# Altium PCB RFIDv2.PcbDoc
Units mil, origin at the board's own origin, x right, y up, seen from the top; angles counter-clockwise.
Board outline 4822.83 x 2165.35 mil, 3 copper layers (Top Layer, Mid-Layer 16, Bottom Layer); 42 components, 21 nets, 156 pads, 26 vias.
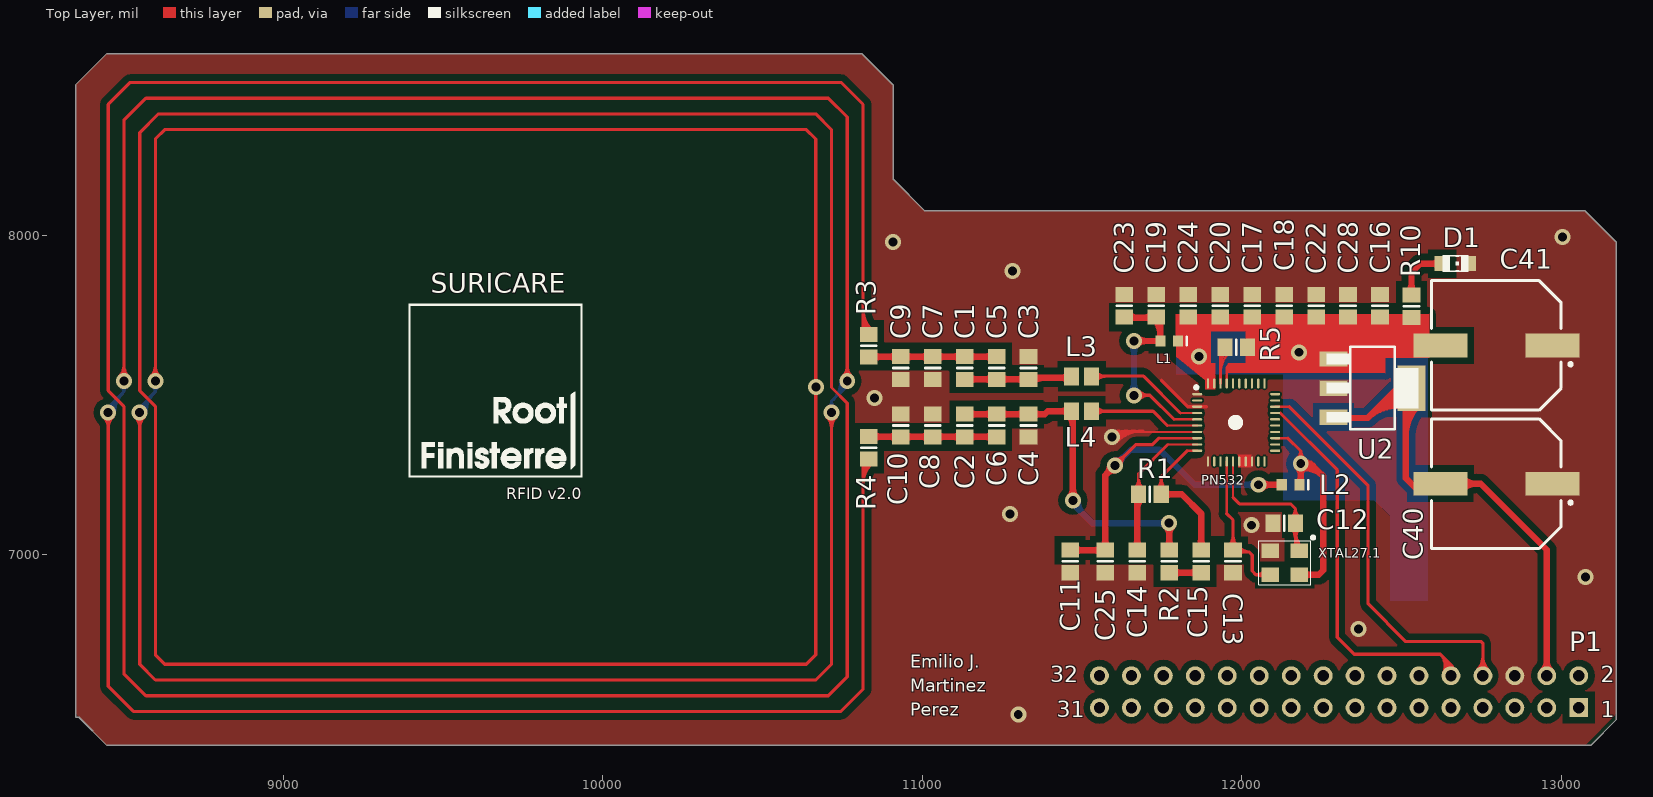
[diagram p0: Top Layer view]
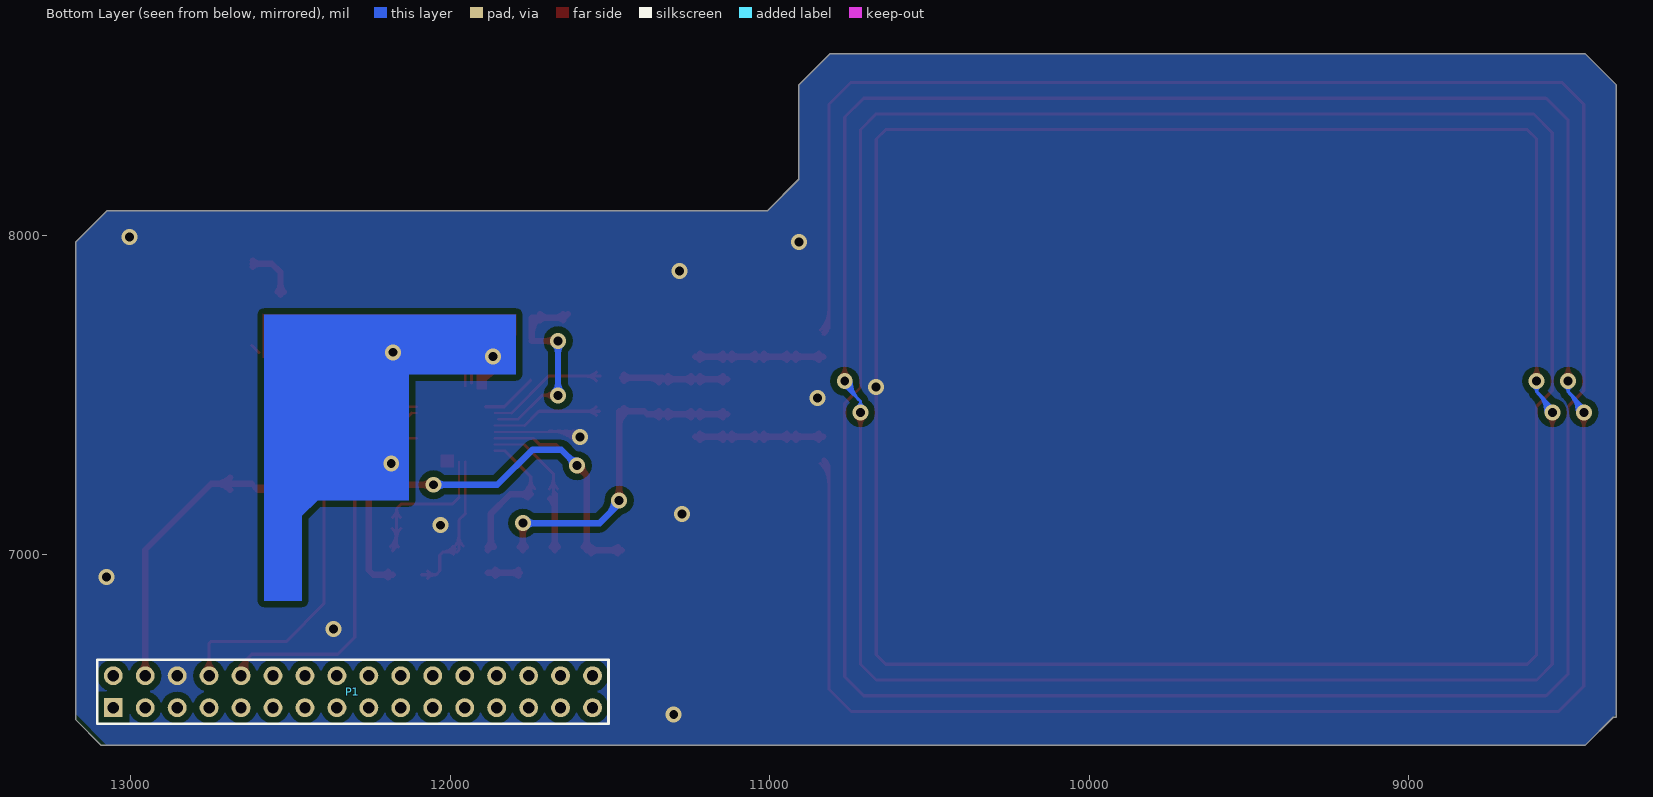
[diagram p1: Bottom Layer view, seen from below]
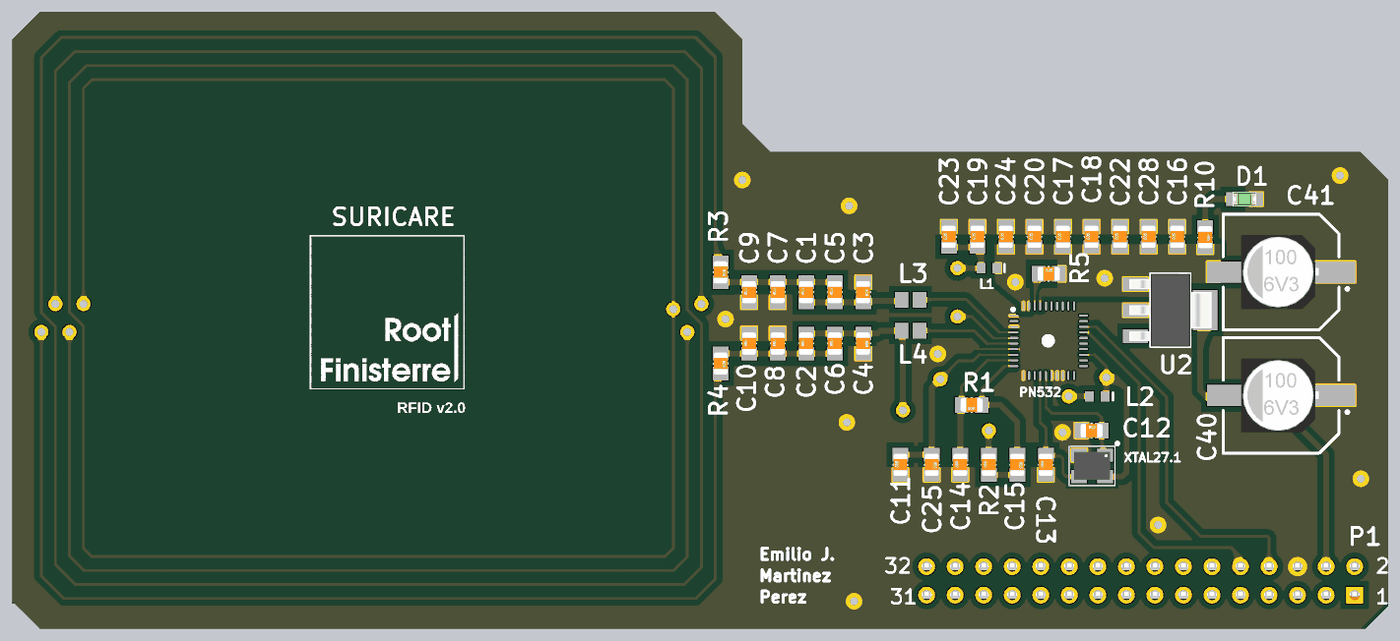
[diagram p2: 3D render of the assembled board from above, using the file's embedded part models]

## Layer stack, top to bottom
Top Layer: signal copper 1.4
Dielectric: dielectric 12.6, FR-4, Dk 4.8
Mid-Layer 16: signal copper 1.4
Dielectric: dielectric 12.6, FR-4, Dk 4.8
Bottom Layer: signal copper 1.4

## Board outline
8349.41,8470.47 8447.83,8568.9 10810.04,8568.9 10908.46,8470.47 10908.46,8175.2 11006.89,8076.77 13073.82,8076.77 13172.24,7978.35 13172.24,6484.35 13091.43,6403.54 13073.82,6403.54 8447.83,6403.54 8359.56,6491.82 8349.41,6491.82

## Design rules (kind name [scope] priority, off if disabled: settings)
Clearance Clearance_PN532 [InComponent('PN532')] p1: gap=5
Clearance "Clearance global" [All] p2: gap=20
PlaneClearance PlaneClearance_PN532 [InComponent('PN532')] p1: clearance=20
PlaneClearance [All] p2: clearance=15
PlaneConnect [All] p1: planeconnectstyle=Direct reliefexpansion=40 reliefentries=4 reliefconductorwidth=40 reliefairgap=0
PolygonConnect [All] p1: connectstyle=Direct reliefconductorwidth=30 reliefentries=4 polygonreliefangle="90 Angle" airgapwidth=0
RoutingVias [All] p1: holewidth=28 width=50 viastyle="Through Hole" minholewidth=28 minwidth=50 maxholewidth=28 maxwidth=50
SolderMaskExpansion [All] p1: expansion=4
Width [All] p1: maxlimit=20 minlimit=5 preferedwidth=20 midlayer16_minwidth=10 midlayer16_maxwidth=10 midlayer16_prefwidth=10 minimp=50.000000 maximp=50.000000 favimp=50.000000
26 further rules are at their usual default settings.

## Components (designator, comment, footprint, x,y, rotation, side; value= is the part's Value field where it differs from the comment)
C1 "22p" 0805 11132.09,7584.65 r90 top
C2 "22p" 0805 11132.09,7404.65 r90 top
C3 "220p" 0805 11332.09,7584.65 r270 top
C4 "NC" 0805 11332.09,7404.65 r270 top
C5 "NC" 0805 11232.09,7584.65 r90 top
C6 "NC" 0805 11232.09,7404.65 r90 top
C7 "220p" 0805 11032.09,7584.65 r90 top
C8 "220p" 0805 11032.09,7404.65 r90 top
C9 "NC" 0805 10932.09,7584.65 r90 top
C10 "NC" 0805 10932.09,7404.65 r90 top
C11 "10u" 0805 11462.09,6979.21 r90 top
C12 "12p" 0805 12132.09,7099.21 r0 top
C13 "12p" 0805 11972.09,6979.21 r90 top
C14 "0.1u" 0805 11672.09,6979.21 r90 top
C15 "1000p" 0805 11872.09,6979.21 r270 top
C16 "0.1u" 0805 12432.09,7779.21 r90 top
C17 "0.1u" 0805 12032.09,7779.21 r90 top
C18 "10u" 0805 12132.09,7779.21 r90 top
C19 "10u" 0805 11732.09,7779.21 r90 top
C20 "CAP" 0805 11932.09,7779.21 r90 top
C22 "0.1u" 0805 12232.09,7779.21 r90 top
C23 "0.1u" 0805 11632.09,7779.21 r90 top
C24 "0.1u" 0805 11832.09,7779.21 r90 top
C25 "0.1u" 0805 11572.09,6979.21 r270 top
C28 "CAP" 0805 12332.09,7779.21 r90 top
C40 "Comment" CAPAE-G 12971.46,7222.44 r180 top
C41 "Comment" CAPAE-G 12971.46,7655.51 r180 top
D1 "LED_SMD" LED0805_GREEN 12668.31,7911.42 r270 top
L1 "Inductor" INDC1608L 11772.09,7669.21 r180 top
L2 "Inductor" INDC1608L 12152.09,7219.21 r180 top
L3 "Comment" 2029 11498.03,7558.07 r0 top
L4 "Comment" 2029 11498.03,7449.8 r0 top
P1 "Header 16X2" HDR2X16 13054.13,6521.65 r180 bottom
PN532 "PN532" PN532 11982.09,7414.21 r0 top
R1 "1k" 0805 11712.09,7189.21 r180 top
R2 "1.69k" 0805 11772.09,6979.21 r90 top
R3 "3.3" 0805 10832.09,7654.65 r270 top
R4 "3.3" 0805 10832.09,7334.65 r270 top
R5 "10k" 0805 11982.09,7649.21 r0 top
R10 "2k" 0805 12530.51,7777.56 r270 top
U2 "CX1117" SOT223 12408.46,7521.65 r270 top
XTAL27.1 "XTAL" "Crystal SMD" 12132.09,6969.21 r180 top (schematic designator 27.12MHz)

## Footprints (in the part's own frame and the unit in brackets; to place one, negate y for a bottom-side part, rotate by r counter-clockwise, add the part's x,y. Pads: shape width x height; smd on the part's side, far side on the other; paste and mask are expansions set on the pad)
0805 [mm]
  rect 1.2x1.4 smd: 1(-0.9,0) 2(0.9,0)
  silkscreen extent 0,-0.6 0,0.6, body extent -1,-0.62 1,0.63, height 0.78
2029 [mm] "Chip Inductor, Body 2.0x1.2mm, IPC High Density"
  rect 1.2x1.4 smd: 1(-0.8,0)
  rect 1.2x1.4 smd paste+0: 2(0.8,0)
  body extent -1.1,-0.7 1.1,0.7, height 0.55
CAPAE-G [mm]
  rect 4.3x1.9 smd: 1(0,0) 2(8.9,0)
  silkscreen extent -1.58,-5.15 9.6,5.15, body extent 1.1,-3.3 8.3,3.3, height 5.5
"Crystal SMD" [mm] "Quartz Crystal, SM; Body 3.2 x 2.5 mm (LxW max)"
  rect 1.4x1.15 smd: 1(-1.2,-1.1) 2(1.1,-1.1) 3(1.1,0.8) 4(-1.2,0.8)
  silkscreen extent -2.43,-2.27 2,1.6, body extent -1.65,-1.4 1.55,1.1, height 0.91
HDR2X16 [mm] "Connector; Header; 16x2 Position"
  rect 1.5x1.5 hole 0.9: 1(0,0)
  round 1.5 hole 0.9: 2(0,2.54) 3(2.54,0) 4(2.54,2.54) 5(5.08,0) 6(5.08,2.54) 7(7.62,0) 8(7.62,2.54) 9(10.16,0) 10(10.16,2.54) 11(12.7,0) 12(12.7,2.54) 13(15.24,0) 14(15.24,2.54) 15(17.78,0) 16(17.78,2.54) 17(20.32,0) 18(20.32,2.54) 19(22.86,0) 20(22.86,2.54) 21(25.4,0) 22(25.4,2.54) 23(27.94,0) 24(27.94,2.54) 25(30.48,0) 26(30.48,2.54) 27(33.02,0) 28(33.02,2.54) 29(35.56,0) 30(35.56,2.54) 31(38.1,0) 32(38.1,2.54)
  silkscreen extent -1.27,-1.27 39.37,3.81, body extent -1.39,-1.1 39.5,3.9, height 8.5
INDC1608L [mm] "Chip Inductor, Body 1.6x0.8mm, IPC High Density"
  rect 0.8x0.9 smd: 1(-0.7,0) 2(0.7,0)
  silkscreen extent -1.4,-0.35 -1.4,0.35, body extent -0.87,-0.48 0.87,0.48, height 0.55
LED0805_GREEN [mm]
  rect 1.2x1.2 smd: A(0,-1.05) C(0,1.05)
  silkscreen extent -0.68,-1.05 0.68,1.05, body extent -0.62,-1.01 0.62,1.01, height 1.1
PN532 [mm] "40-Pin Leaded Chip Carrier 0.5 mm Pitch, IPC High Density"
  oval 0.8x0.18 smd: 1(-3.1,2.25) 2(-3.1,1.75) 3(-3.1,1.25) 4(-3.1,0.75) 5(-3.1,0.25) 6(-3.1,-0.25) 7(-3.1,-0.75) 8(-3.1,-1.25) 9(-3.1,-1.75) 10(-3.1,-2.25) 21(3.1,-2.25) 22(3.1,-1.75) 23(3.1,-1.25) 24(3.1,-0.75) 25(3.1,-0.25) 26(3.1,0.25) 27(3.1,0.75) 28(3.1,1.25) 29(3.1,1.75) 30(3.1,2.25)
  oval 0.18x0.8 smd: 11(-2.25,-3.1) 12(-1.75,-3.1) 13(-1.25,-3.1) 14(-0.75,-3.1) 15(-0.25,-3.1) 16(0.25,-3.1) 17(0.75,-3.1) 18(1.25,-3.1) 19(1.75,-3.1) 20(2.25,-3.1) 31(2.25,3.1) 32(1.75,3.1) 33(1.25,3.1) 34(0.75,3.1) 35(0.25,3.1) 36(-0.25,3.1) 37(-0.75,3.1) 38(-1.25,3.1) 39(-1.75,3.1) 40(-2.25,3.1)
  silkscreen extent -3.3,-0.3 0.25,2.92, body extent -3,-3 3,3, height 1
SOT223 [mil]
  rect 48x88 smd: 1(-91,-122) 2(0,-122) 3(91,-122)
  rect 141.73x86.61 smd: 4(0,122.01)
  silkscreen extent -129,-144 129,144, body extent -128,-138 128,138, height 65

## Part data
C1 C2 C3 C4 C5 C6 C7 C8 C9 C10 C11 C12 C13 C14 C15 C16 C17 C18 C19 C20 C22 C23 C24 C25 C28: library part CAP_1, "Capacitor"
C40 C41: library part COND_ELEC_1
D1: "LED SMD"
P1: "Header, 16-Pin, Dual row"
R1 R2 R3 R4 R5 R10: library part RES_1, "Resistencia"
U2: "adjustable  and fixed voltage regulator"
XTAL27.1: "Crystal Oscillator"

## Via types
v1: diameter 50, hole 28, Top Layer to Bottom Layer, 26 vias

## Nets (pads, with @x,y where several pads share a name; then routed paths per layer and width w, separated by ;. In a path a pad name is that pad's centre, name@x,y a point inside that pad or via, vN(x,y) a via of type N, cw(c..) or ccw(c..) an arc to the next point about the centre after c; other vN are vias at no path point)
+V5: C40.2 P1.4 U2.3 U2.4 | length 2439.6
  Top Layer w20: U2.3@12298.28,7428.21 12393.76,7428.21 ; U2.3@12316.36,7420.75 cw(c12334.37,7402.75) 12334.37,7428.21 ; U2.3@12316.36,7440.55 ccw(c12346.16,7470.35) 12346.16,7428.21 ; 12418.06,7452.51 cw(c12497.2,7373.37) U2.4@12526.94,7481.27 ; 12442.36,7476.8 cw(c12507.7,7411.46) U2.4@12532.25,7500.55 ; 12466.65,7501.1 cw(c12518.19,7449.55) U2.4@12537.56,7519.83 ; U2.4@12490.94,7525.39 cw(c12528.69,7487.64) U2.4@12542.88,7539.11 ; U2.4@12498.15,7529.68 cw(c12484.77,7533) 12484.77,7519.21 ; U2.4@12499.58,7509.21 ccw(c12484.76,7503.25) 12484.76,7519.21 ; 12512.8,7371.01 cw(c12653.56,7371.01) U2.4@12554.02,7470.54 ; 12512.8,7419.29 cw(c12605.27,7419.29) U2.4@12539.88,7484.69 ; U2.4@12518.7,7519.21 12484.76,7519.21 ; U2.4@12521.62,7461.98 ccw(c12486.7,7335.29) 12393.77,7428.22 ; U2.4 12512.8,7503.98 12512.8,7240.16 12550.2,7202.76 C40.2@12601.38,7202.76 ; C40.2@12571.85,7210.63 C40.2@12609.25,7210.63 ; C40.2 12747.05,7222.44 12954.13,7015.35 P1.4 ; C40.2@12687.68,7203.07 cw(c12734.46,7156.29) 12734.46,7222.44 cw(c12734.46,7288.59) C40.2@12687.68,7241.82 ; P1.4@12940.33,6635.46 ccw(c12906.99,6668.8) 12954.13,6668.8 ccw(c13001.28,6668.8) P1.4@12967.94,6635.46 ; 12393.76,7428.21 12484.76,7519.21
GND: C3.1 C4.2 C7.1 C8.2 C9.1 C10.2 C11.1 C12.1 C13.1 C14.1 C16.2 C17.2 C18.2 C19.2 C20.2 C22.2 C23.2 C24.2 C25.2 C28.2 C40.1 C41.1 D1.C P1.6 PN532.1 PN532.3 PN532.7 PN532.11 PN532.16 PN532.17 PN532.18 U2.2 XTAL27.1.2 | length 720
  Top Layer w7: v1@11610.08,7384.69 PN532.7
  Top Layer w10: v1@11586.43,7375.18 cw(c11616.89,7344.73) 11616.89,7387.8 ; v1@11600.58,7361.04 cw(c11665.17,7296.44) 11665.17,7387.8 ; v1@11602.39,7386.03 ccw(c11606.56,7394.42) 11613.19,7387.79 ccw(c11619.82,7381.17) v1@11611.42,7377 ; v1@11607.65,7353.97 cw(c11689.31,7272.3) 11689.31,7387.8 ; v1@11610.08,7384.69 v1(11593.5,7368.11) cw(c11641.03,7320.59) 11641.03,7387.8 ; 11748,7546 11830.57,7463.43 11888,7463.43
  other v1: 11300,6500 12365.16,6767.72 13075.79,6930.12 12030.51,7092.52 11274.61,7127.95 10849.41,7490.16 10666.34,7525 11282.48,7887.8 10908.46,7978.35 13002.95,7994.09
Net27.12MHz_1: C13.2 PN532.14 XTAL27.1.3 | length 675.5
  Top Layer w7: 11952.56,7128.74 PN532.14
  Top Layer w10: 11952.56,7128.74 11972.09,7109.21 C13.2 11977.52,7009.21 12022.09,7009.21 ; C13.2@11958.92,7027.81 ccw(c11927.13,7059.6) 11972.09,7059.6 ccw(c12017.04,7059.6) C13.2@11985.25,7027.81 ; C13.2@11983.1,7019.57 ccw(c12002.94,7033.38) 12002.94,7009.21 ; C13.2@11989.19,7001.48 cw(c12007.86,6982.81) 12007.86,7009.21 ; C13.2@11991.31,7025.29 ccw(c12022.08,7046.72) 12022.08,7009.21 ; XTAL27.1.3@12070.9,6925.76 ccw(c12043.58,6900.56) 12043.58,6937.72 ; XTAL27.1.3@12070.9,6949.68 cw(c12043.58,6974.88) 12043.58,6937.72 ; XTAL27.1.3 12043.58,6937.72 ; 12022.09,7009.21 12032.09,6999.21 12032.09,6949.21 12043.58,6937.72
Net27.12MHz_2: C12.2 PN532.15 XTAL27.1.1 | length 689.8
  Top Layer w7: 11972.24,7179.06 PN532.15
  Top Layer w10: 11972.24,7179.06 11992.09,7159.21 12152.09,7159.21 12167.52,7143.78 ; C12.2@12154.35,7082.11 cw(c12122.56,7050.32) 12167.52,7050.32 cw(c12212.48,7050.32) C12.2@12180.69,7082.11 ; C12.2@12155.36,7117.26 ccw(c12132.51,7143.78) 12167.52,7143.78 ; XTAL27.1.1@12161.94,7024.99 ccw(c12148.46,7038.47) 12167.52,7038.47 ; 12167.52,7047.59 ccw(c12209.48,7047.59) XTAL27.1.1@12179.81,7017.92 ; C12.2@12167.52,7071.73 ccw(c12233.62,7071.73) XTAL27.1.1@12186.88,7024.99 ; XTAL27.1.1 12167.52,7024.33 C12.2 12167.52,7143.78 ; C12.2@12179.68,7117.26 cw(c12202.53,7143.78) 12167.52,7143.78
NetC1_1: C1.1 C3.2 C5.1 L3.1 | length 629.9
  Top Layer w20: C1.1 C5.1 C3.2 11337.52,7554.65 L3.1@11461.09,7554.65 ; C1.1@11145.66,7539.58 cw(c11168.91,7516.33) 11168.91,7549.21 cw(c11168.91,7582.1) C1.1@11145.66,7558.84 ; C5.1@11218.52,7539.58 ccw(c11195.26,7516.33) 11195.26,7549.21 ccw(c11195.26,7582.1) C5.1@11218.52,7558.84 ; C5.1@11245.66,7539.58 cw(c11268.91,7516.33) 11268.91,7549.21 cw(c11268.91,7582.1) C5.1@11245.66,7558.84 ; C3.2@11318.52,7539.58 ccw(c11295.26,7516.33) 11295.26,7549.21 ccw(c11295.26,7582.1) C3.2@11318.52,7558.84 ; C3.2@11345.66,7539.58 cw(c11382.03,7503.21) 11382.03,7554.65 ; 11432.41,7554.65 cw(c11432.41,7520.01) L3.1@11456.9,7544.5 ; 11434.89,7554.65 ccw(c11434.89,7585.78) L3.1@11456.9,7563.77
NetC1_2: C1.2 C5.2 C7.2 C9.2 R3.2 | length 813.6
  Top Layer w20: R3.2 10832.95,7620.08 C9.2 C7.2 C1.2 C5.2 ; R3.2@10845.66,7609.58 cw(c10871.01,7584.23) 10871.01,7620.08 ; R3.2@10845.66,7628.84 ccw(c10866.81,7650) 10866.81,7620.08 ; C9.2@10918.52,7610.45 ccw(c10895.26,7587.19) 10895.26,7620.08 ccw(c10895.26,7652.97) C9.2@10918.52,7629.71 ; C9.2@10945.66,7610.45 cw(c10968.91,7587.19) 10968.91,7620.08 cw(c10968.91,7652.97) C9.2@10945.66,7629.71 ; C7.2@11018.52,7610.45 ccw(c10995.26,7587.19) 10995.26,7620.08 ccw(c10995.26,7652.97) C7.2@11018.52,7629.71 ; C7.2@11045.66,7610.45 cw(c11068.91,7587.19) 11068.91,7620.08 cw(c11068.91,7652.97) C7.2@11045.66,7629.71 ; C1.2@11118.52,7610.45 ccw(c11095.26,7587.19) 11095.26,7620.08 ccw(c11095.26,7652.97) C1.2@11118.52,7629.71 ; C1.2@11145.66,7610.45 cw(c11168.91,7587.19) 11168.91,7620.08 cw(c11168.91,7652.97) C1.2@11145.66,7629.71 ; C5.2@11218.52,7610.45 ccw(c11195.26,7587.19) 11195.26,7620.08 ccw(c11195.26,7652.97) C5.2@11218.52,7629.71
NetC2_1: C2.1 C6.1 C8.1 C10.1 R4.1 | length 813.6
  Top Layer w20: R4.1 10832.95,7369.21 C10.1 C8.1 C2.1 C6.1 ; R4.1@10845.66,7360.45 cw(c10866.81,7339.29) 10866.81,7369.21 ; R4.1@10845.66,7379.71 ccw(c10871.01,7405.06) 10871.01,7369.21 ; C10.1@10918.52,7359.58 ccw(c10895.26,7336.33) 10895.26,7369.21 ccw(c10895.26,7402.1) C10.1@10918.52,7378.84 ; C10.1@10945.66,7359.58 cw(c10968.91,7336.33) 10968.91,7369.21 cw(c10968.91,7402.1) C10.1@10945.66,7378.84 ; C8.1@11018.52,7359.58 ccw(c10995.26,7336.33) 10995.26,7369.21 ccw(c10995.26,7402.1) C8.1@11018.52,7378.84 ; C8.1@11045.66,7359.58 cw(c11068.91,7336.33) 11068.91,7369.21 cw(c11068.91,7402.1) C8.1@11045.66,7378.84 ; C2.1@11118.52,7359.58 ccw(c11095.26,7336.33) 11095.26,7369.21 ccw(c11095.26,7402.1) C2.1@11118.52,7378.84 ; C2.1@11145.66,7359.58 cw(c11168.91,7336.33) 11168.91,7369.21 cw(c11168.91,7402.1) C2.1@11145.66,7378.84 ; C6.1@11218.52,7359.58 ccw(c11195.26,7336.33) 11195.26,7369.21 ccw(c11195.26,7402.1) C6.1@11218.52,7378.84
NetC2_2: C2.2 C4.1 C6.2 L4.1 R2.2 | length 1660.3
  Top Layer w20: C2.2 C6.2 C4.1 11382.95,7440.08 11392.09,7449.21 11471.09,7449.21 v1(11471.09,7170.21) ; C2.2@11145.66,7430.45 cw(c11168.91,7407.19) 11168.91,7440.08 cw(c11168.91,7472.97) C2.2@11145.66,7449.71 ; C6.2@11218.52,7430.45 ccw(c11195.26,7407.19) 11195.26,7440.08 ccw(c11195.26,7472.97) C6.2@11218.52,7449.71 ; C6.2@11245.66,7430.45 cw(c11268.91,7407.19) 11268.91,7440.08 cw(c11268.91,7472.97) C6.2@11245.66,7449.71 ; C4.1@11318.52,7430.45 ccw(c11295.26,7407.19) 11295.26,7440.08 ccw(c11295.26,7472.97) C4.1@11318.52,7449.71 ; C4.1@11345.66,7430.45 cw(c11368.91,7407.19) 11368.91,7440.08 cw(c11368.91,7472.97) C4.1@11345.66,7449.71 ; 11432.22,7449.21 ccw(c11432.22,7484.12) L4.1@11456.9,7459.44 ; 11435.08,7449.21 cw(c11435.08,7418.34) L4.1@11456.9,7440.17 ; L4.1@11456.9,7436.23 cw(c11422.66,7401.99) 11471.09,7401.99 ; v1@11460.48,7180.82 ccw(c11434.87,7206.43) 11471.09,7206.43 ccw(c11507.3,7206.43) v1@11481.69,7180.82 ; v1@11761.48,7088.61 cw(c11735.87,7063) 11772.09,7063 cw(c11808.3,7063) v1@11782.69,7088.61 ; R2.2@11762.45,7024.28 ccw(c11739.2,7047.53) 11772.09,7047.53 ccw(c11804.97,7047.53) R2.2@11781.72,7024.28 ; R2.2 v1(11772.09,7099.21)
  Bottom Layer w20: v1(11471.09,7170.21) 11471.09,7160.21 11532.09,7099.21 v1(11772.09,7099.21) ; v1@11486.09,7170.21 ccw(c11546.44,7170.21) 11503.76,7127.53 ; v1@11761.48,7088.61 ccw(c11735.87,7063) 11735.87,7099.21 ccw(c11735.87,7135.43) v1@11761.48,7109.82
NetC7_1: R3.1 R4.2 | length 32875.6
  Top Layer w10: v1@8437.63,7430.74 cw(c8403.49,7396.6) 8451.77,7396.6 cw(c8500.06,7396.6) v1@8465.91,7430.74 ; v1(8451.77,7444.88) 8451.77,6588.58 8530.51,6509.84 10745.08,6509.84 10813.98,6578.74 10813.98,7281.1 R4.2 ; v1@8486.84,7557.45 ccw(c8452.7,7591.59) 8500.98,7591.59 ccw(c8549.27,7591.59) v1@8515.13,7557.45 ; v1(8500.98,7543.31) 8500.98,8360.24 8569.88,8429.13 10705.71,8429.13 10764.76,8370.08 v1(10764.76,7543.31) ; v1@8536.05,7430.74 cw(c8501.91,7396.6) 8550.2,7396.6 cw(c8598.48,7396.6) v1@8564.34,7430.74 ; v1@8550.2,7454.72 v1(8550.2,7444.88) 8550.2,6657.48 8599.41,6608.27 10666.34,6608.27 10715.55,6657.48 v1(10715.55,7444.88) ; v1@8585.27,7557.45 ccw(c8551.13,7591.59) 8599.41,7591.59 ccw(c8647.69,7591.59) v1@8613.55,7557.45 ; v1(8599.41,7543.31) 8599.41,8301.18 8628.94,8330.71 10636.81,8330.71 10666.34,8301.18 10666.34,6687.01 10636.81,6657.48 8628.94,6657.48 8599.41,6687.01 8599.41,7464.57 8550.2,7513.78 8550.2,8320.87 8609.25,8379.92 10666.34,8379.92 10715.55,8330.71 10715.55,7523.62 10764.76,7474.41 10764.76,6618.11 10705.71,6559.06 8569.88,6559.06 8500.98,6627.95 8500.98,7464.57 8451.77,7513.78 8451.77,8409.45 8520.67,8478.35 10745.08,8478.35 10813.98,8409.45 10813.98,7708.19 R3.1@10832.44,7689.73 ; v1@10701.41,7430.74 cw(c10667.27,7396.6) 10715.55,7396.6 cw(c10763.84,7396.6) v1@10729.69,7430.74 ; v1@10750.62,7557.45 ccw(c10716.48,7591.59) 10764.76,7591.59 ccw(c10813.05,7591.59) v1@10778.91,7557.45 ; 10813.98,7220.04 cw(c10907.32,7220.04) R4.2@10841.32,7286.04 ; 10813.98,7244.18 cw(c10883.18,7244.18) R4.2@10834.25,7293.12 ; 10813.98,7268.32 cw(c10859.04,7268.32) R4.2@10827.18,7300.19 ; 10813.98,7720.97 ccw(c10859.04,7720.97) R3.1@10827.18,7689.11 ; 10813.98,7745.11 ccw(c10883.18,7745.11) R3.1@10834.25,7696.18 ; 10813.98,7769.26 ccw(c10907.32,7769.26) R3.1@10841.32,7703.25
  Bottom Layer w10: v1@8461.77,7444.88 cw(c8523.93,7444.88) 8479.98,7488.84 ; 8462.91,7471.77 ccw(c8489.79,7444.88) v1(8451.77,7444.88) 8451.77,7460.63 8500.98,7509.84 ; v1@8471.77,7444.88 cw(c8558.08,7444.88) 8497.05,7505.91 ; v1@8491.51,7525.69 cw(c8482.99,7509.84) 8500.98,7509.84 ; v1(8500.98,7543.31) 8500.98,7509.84 ; v1@8510.46,7525.69 ccw(c8518.98,7509.84) 8500.98,7509.84 ; v1@8560.2,7444.88 cw(c8622.36,7444.88) 8578.4,7488.84 ; 8561.33,7471.77 ccw(c8588.22,7444.88) v1(8550.2,7444.88) 8550.2,7460.63 8599.41,7509.84 ; v1@8570.2,7444.88 cw(c8656.5,7444.88) 8595.47,7505.91 ; v1@8589.94,7525.69 cw(c8581.41,7509.84) 8599.41,7509.84 ; v1(8599.41,7543.31) 8599.41,7509.84 ; v1@8608.88,7525.69 ccw(c8617.4,7509.84) 8599.41,7509.84 ; v1@10705.22,7462 ccw(c10694.17,7480.31) 10715.55,7480.31 ; v1(10715.55,7444.88) 10715.55,7480.31 ; 10720.88,7485.64 ccw(c10663.21,7543.31) v1@10744.76,7543.31 ; v1@10725.89,7462 cw(c10736.94,7480.31) 10715.55,7480.31 ; 10737.95,7502.71 ccw(c10697.36,7543.31) v1@10754.76,7543.31 ; 10754.14,7518.91 cw(c10764.76,7508.29) v1@10764.76,7523.31 ; 10755.02,7519.78 ccw(c10731.5,7543.31) v1(10764.76,7543.31) 10764.76,7529.53 10715.55,7480.31
NetC11_2: C11.2 C25.1 L2.2 PN532.8 | length 1727.5
  Top Layer w7: 11740,7365 PN532.8
  Top Layer w10: v1(11602.09,7279.21) 11667.36,7344.49 11719.49,7344.49 11740,7365 ; v1@11602.09,7299.21 ccw(c11602.09,7347.5) 11636.23,7313.35 ccw(c11670.37,7279.21) v1@11622.09,7279.21
  Top Layer w20: C11.2 C25.1 11572.09,7249.21 v1(11602.09,7279.21) ; C11.2@11475.66,7005.01 cw(c11498.91,6981.76) 11498.91,7014.65 cw(c11498.91,7047.53) C11.2@11475.66,7024.28 ; C25.1@11558.52,7005.01 ccw(c11535.26,6981.76) 11535.26,7014.65 ccw(c11535.26,7047.53) C25.1@11558.52,7024.28 ; C25.1@11562.45,7024.28 ccw(c11539.2,7047.53) 11572.09,7047.53 ccw(c11604.97,7047.53) C25.1@11581.72,7024.28 ; v1@11587.09,7279.21 cw(c11550.87,7279.21) 11576.48,7253.61 cw(c11602.09,7228) v1@11602.09,7264.21 ; v1(12052.09,7219.21) L2.2 ; v1@12062.69,7208.61 cw(c12088.3,7183) 12088.3,7219.21 cw(c12088.3,7255.43) v1@12062.69,7229.82
  Bottom Layer w20: v1(11602.09,7279.21) 11652.09,7329.21 11742.09,7329.21 11852.09,7219.21 v1(12052.09,7219.21) ; v1@11602.09,7294.21 ccw(c11602.09,7330.43) 11627.69,7304.82 ccw(c11653.3,7279.21) v1@11617.09,7279.21 ; v1@12041.48,7208.61 ccw(c12015.87,7183) 12015.87,7219.21 ccw(c12015.87,7255.43) v1@12041.48,7229.82
NetC14_2: C14.2 PN532.9 R1.2 | length 620.8
  Top Layer w7: 11768.19,7345.31 PN532.9
  Top Layer w10: R1.2@11663.48,7206.32 ccw(c11631.69,7238.11) 11676.65,7238.11 ccw(c11721.61,7238.11) R1.2@11689.82,7206.32 ; R1.2 11676.65,7253.78 11768.19,7345.31
  Top Layer w20: C14.2@11662.45,7024.28 ccw(c11639.2,7047.53) 11672.09,7047.53 ccw(c11704.97,7047.53) C14.2@11681.72,7024.28 ; C14.2 R1.2@11672.09,7189.21 ; 11672.09,7141.37 cw(c11720.56,7141.37) R1.2@11686.28,7175.64
NetC15_1: C15.1 PN532.10 R1.1 | length 643.6
  Top Layer w7: 11828.5,7325.63 PN532.10
  Top Layer w10: R1.1@11734.35,7206.32 ccw(c11702.56,7238.11) 11747.52,7238.11 ccw(c11792.48,7238.11) R1.1@11760.69,7206.32 ; R1.1 11747.52,7244.65 11828.5,7325.63
  Top Layer w20: R1.1 11812.09,7189.21 11872.09,7129.21 11872.09,7024.65 C15.1@11882.09,7014.65 ; R1.1@11757.15,7179.58 cw(c11780.41,7156.33) 11780.41,7189.21 cw(c11780.41,7222.1) R1.1@11757.15,7198.84 ; C15.1@11862.45,7024.28 ccw(c11839.2,7047.53) 11872.09,7047.53 ccw(c11904.97,7047.53) C15.1@11881.72,7024.28
NetC15_2: C15.2 R2.1 | length 203.3
  Top Layer w20: R2.1@11782.09,6943.78 C15.2@11882.09,6943.78 ; R2.1@11785.66,6934.15 cw(c11808.91,6910.89) 11808.91,6943.78 cw(c11808.91,6976.66) R2.1@11785.66,6953.41 ; C15.2@11858.52,6934.15 ccw(c11835.26,6910.89) 11835.26,6943.78 ccw(c11835.26,6976.66) C15.2@11858.52,6953.41
NetC19_1: C19.1 C23.1 L1.2 PN532.5 | length 1060.7
  Top Layer w7: 11787.24,7424.06 PN532.5@11850.04,7424.06
  Top Layer w10: v1(11662.09,7499.21) 11712.09,7499.21 11787.24,7424.06 ; v1@11676.23,7485.07 cw(c11710.37,7450.93) 11710.37,7499.21 cw(c11710.37,7547.5) v1@11676.23,7513.35
  Top Layer w20: C23.1@11632.09,7753.78 11644.53,7741.34 11744.53,7741.34 11744.53,7679.21 11742.09,7676.77 L1.2@11742.09,7669.21 ; C23.1@11645.66,7734.15 cw(c11663.02,7716.78) 11663.02,7741.34 ; C23.1@11645.66,7753.41 ccw(c11674.8,7782.56) 11674.8,7741.34 ; v1(11662.09,7669.21) L1.2@11742.09,7669.21 ; v1@11672.69,7658.61 cw(c11698.3,7633) 11698.3,7669.21 cw(c11698.3,7705.43) v1@11672.69,7679.82 ; 11689.37,7741.34 ccw(c11689.37,7782.56) C19.1@11718.52,7753.41 ; 11701.16,7741.34 cw(c11701.16,7716.78) C19.1@11718.52,7734.15 ; C19.1@11726.39,7734.15 cw(c11682.61,7690.36) 11744.53,7690.36 ; L1.2 L1.2@11742.09,7669.21
  Bottom Layer w20: v1@11651.48,7509.82 ccw(c11625.87,7535.43) 11662.09,7535.43 ccw(c11698.3,7535.43) v1@11672.69,7509.82 ; v1@11651.48,7658.61 cw(c11625.87,7633) 11662.09,7633 cw(c11698.3,7633) v1@11672.69,7658.61 ; v1(11662.09,7499.21) v1(11662.09,7669.21)
NetD1_2: D1.A R10.1 | length 272.2
  Top Layer w20: R10.1@12520.88,7822.63 ccw(c12497.63,7845.88) 12530.51,7845.88 ccw(c12563.4,7845.88) R10.1@12540.14,7822.63 ; R10.1 12530.51,7883.86 12558.07,7911.42 D1.A@12617.13,7911.42 ; D1.A@12617.33,7901.79 ccw(c12594.08,7878.53) 12594.08,7911.42 ccw(c12594.08,7944.3) D1.A@12617.33,7921.05
NetL3_2: L3.2 PN532.4 | length 449
  Top Layer w7: 11807.56,7443.74 PN532.4
  Top Layer w10: L3.2@11529.53,7559.21 11692.09,7559.21 11807.56,7443.74 ; L3.2@11542.7,7544.9 cw(c11577.24,7510.36) 11577.24,7559.21 ; L3.2@11542.7,7571.24 ccw(c11571.73,7600.27) 11571.73,7559.21
NetL4_2: L4.2 PN532.6 | length 416.1
  Top Layer w7: 11766.93,7404.37 PN532.6
  Top Layer w10: L4.2@11533.09,7449.21 11722.09,7449.21 11766.93,7404.37 ; L4.2@11542.7,7436.64 cw(c11573.06,7406.27) 11573.06,7449.21 ; L4.2@11542.7,7462.97 ccw(c11575.91,7496.19) 11575.91,7449.21
NetPN532_38: PN532.38 R5.1 | length 278.5
  Top Layer w8: PN532.38 R5.1@11932.87,7635.43 ; 11932.87,7567.05 cw(c12024.87,7567.05) R5.1@11959.82,7632.11 ; 11932.87,7591.2 cw(c12000.73,7591.2) R5.1@11952.75,7639.18
  Top Layer w10: 11932.87,7615.34 cw(c11976.59,7615.34) R5.1@11945.68,7646.25 ; R5.1@11932.87,7635.43 R5.1
RX: P1.10 PN532.27 | length 1454.2
  Top Layer w7: PN532.27 12120.24,7443.74
  Top Layer w10: 12120.24,7443.74 12298.23,7265.75 12298.23,6741.65 12350.91,6688.98 12621.06,6688.98 12654.13,6655.91 ; 12621.07,6688.97 cw(c12584.63,6652.54) P1.10@12631.72,6631.61 ; 12631.36,6678.68 cw(c12598.89,6646.2) P1.10@12640.86,6627.55 ; 12641.66,6668.38 cw(c12613.14,6639.87) P1.10@12650,6623.49 ; P1.10@12646.24,6644.87 ccw(c12642.48,6655.9) 12654.13,6655.9 ; 12651.96,6658.08 cw(c12627.4,6633.53) P1.10@12659.13,6619.43 ; P1.10 12654.13,6655.91 ; P1.10@12662.03,6644.87 cw(c12665.78,6655.9) 12654.13,6655.9
TX: P1.8 PN532.28 | length 1423.1
  Top Layer w7: PN532.28 12147.8,7463.43
  Top Layer w10: 12147.8,7463.43 12394.69,7216.54 12394.69,6846.46 12512.8,6728.35 12749.02,6728.35 12754.13,6723.23 P1.8 ; P1.8@12736.79,6639 ccw(c12694.92,6680.87) 12754.13,6680.87 ccw(c12813.35,6680.87) P1.8@12771.48,6639 ; P1.8@12743.86,6631.93 ccw(c12719.06,6656.73) 12754.13,6656.73 ccw(c12789.21,6656.73) P1.8@12764.41,6631.93
VDD: C16.1 C17.1 C18.1 C20.1 C22.1 C24.1 C28.1 C41.2 L1.1 L2.1 PN532.23 PN532.37 PN532.39 PN532.40 R5.2 R10.2 U2.1 XTAL27.1.4 | length 1505.4
  Top Layer w7: PN532.23 12143.86,7365
  Top Layer w10: 12143.86,7365 12184.06,7324.8 ; v1@12172.26,7301.59 ccw(c12155.31,7324.8) 12184.06,7324.8 ; v1(12184.06,7285.43) 12184.06,7324.8 ; v1@12195.85,7301.59 cw(c12212.8,7324.8) 12184.06,7324.8 ; C41.2@12598.78,7633.23 C41.2
  Top Layer w20: v1@12173.45,7274.83 cw(c12147.84,7249.22) 12184.06,7249.22 cw(c12220.27,7249.22) v1@12194.66,7274.83 ; L2.1@12175.58,7225.25 ccw(c12155.12,7245.7) 12184.06,7245.7 ; XTAL27.1.4 12240.59,6937.72 12254.92,6952.05 12254.92,7246.06 ; L2.1 12184.06,7223.62 v1(12184.06,7285.43) 12215.55,7285.43 ; v1@12183.52,7290.4 cw(c12189,7239.29) 12225.34,7275.64 ; v1@12185.65,7270.52 cw(c12194.72,7185.86) 12254.92,7246.07 ; XTAL27.1.4@12193.19,6928.78 cw(c12214.76,6907.21) 12214.76,6937.72 cw(c12214.76,6968.23) XTAL27.1.4@12193.19,6946.65 ; v1@12195.7,7275.98 cw(c12215.55,7259.87) 12215.55,7285.43 ; v1@12195.7,7294.89 ccw(c12215.55,7311) 12215.55,7285.43 ; 12215.55,7285.43 12254.92,7246.06
  Bottom Layer w20: v1@12167.54,7623.25 cw(c12132.43,7588.14) 12182.09,7588.14 ; v1@12173.45,7296.04 ccw(c12152.59,7316.89) 12182.09,7316.89 ; 12182.09,7326.4 ccw(c12225.02,7326.4) v1@12194.66,7296.04 ; 12182.09,7607.15 cw(c12204.86,7607.15) v1@12188.76,7623.25 ; v1@12182.09,7629.21 12182.09,7287.4 v1(12184.06,7285.43)
  other v1: 11865.16,7620.08 12178.15,7633.86
pads on no net: P1.1 P1.2 P1.3 P1.5 P1.7 P1.9 P1.11 P1.12 P1.13 P1.14 P1.15 P1.16 P1.17 P1.18 P1.19 P1.20 P1.21 P1.22 P1.23 P1.24 P1.25 P1.26 P1.27 P1.28 P1.29 P1.30 P1.31 P1.32 PN532.2 PN532.12 PN532.13 PN532.19 PN532.20 PN532.21 PN532.22 PN532.24 PN532.25 PN532.26 PN532.29 PN532.30 PN532.31 PN532.32 PN532.33 PN532.34 PN532.35 PN532.36

## Polygon pours and split planes (outlines as drawn)
GND on Bottom Layer "Top Layer-No Net" (solid, pour order 13): 8349.41,8470.47 8447.83,8568.9 10810.04,8568.9 10908.46,8470.47 10908.46,8175.2 11006.89,8076.77 13073.82,8076.77 13172.24,7978.35 13172.24,6501.97 13073.82,6403.54 8447.83,6403.54 8349.41,6501.97
GND on Top Layer "Top Layer-No Net" (solid, remove dead copper, pour order 15): 8447.83,8568.9 10810.04,8568.9 10908.46,8470.47 10908.46,8175.2 11006.89,8076.77 13073.82,8076.77 13172.24,7978.35 13172.24,6501.97 13073.82,6403.54 8447.83,6403.54 8349.41,6501.97 8349.41,8470.47 8447.83,8568.9

## Other copper
Top Layer:
  rectangle net GND: 11988,7273.62 12030.51,7314
  region net VDD: 11884.84,7517.72 11916.34,7517.72 11916.34,7599.21 11902.09,7599.21 11902.09,7699.21 12012.09,7699.21 12012.09,7599.61 11957.68,7599.41 11949.06,7587.35 11948.91,7525.59 11955.97,7525.59 11956,7569.22 12447.83,7568.91 12447.83,7616.14 12585.63,7616.14 12585.63,7753.78 11792.09,7753.15 11794.29,7620.08 11884.84,7545.99
Bottom Layer:
  region net VDD: 11794.29,7751.97 12581.69,7751.97 12581.69,6856.3 12463.58,6856.3 12463.58,7122.05 12414.37,7171.26 12128.94,7171.26 12128.94,7564.96 11794.29,7564.96

## Silkscreen, mask and mechanical layers (free items; w line width, h text height)
Top Overlay:
  drawing of 2538 lines, arcs and shapes, not listed
  text "SURICARE" at 9461.61,7820.87 h60
  text "RFID v2.0" at 9697.83,7161.42 h60
  text "Emilio J." at 10961.61,6645.87 h40
  text "Martinez" at 10961.61,6570.87 h40
  text "Perez" at 10961.61,6495.87 h40
Border outline:
  lines w10: 8447.83,8568.9 8349.41,8470.47 8349.41,6501.97 8447.83,6403.54 13078.54,6403.54 13172.24,6497.24 13172.24,7978.35 ; 8453.94,8575 10800,8575 10904.53,8470.47 ; 10908.46,8470.47 10908.46,8175.2 11006.89,8076.77 ; 11008.66,8075 13075,8075 13171.65,7978.35
Top text:
  drawing of 1474 lines, arcs and shapes, not listed
  text "SURICARE" at 9461.61,7820.87 h60
  text "RFID v2.0" at 9697.83,7161.42 h60
Mechanical 16:
  drawing of 5506 lines, arcs and shapes, not listed
  text "1" at 6353.18,10547.2 h70
  text "2" at 9213.18,10547.2 h70
  text "3" at 12093.18,10547.2 h70
  text "4" at 14963.18,10547.2 h70
  text "A" at 5001.18,9641.2 h70
  text "A" at 16301.18,9641.2 h70
  text "B" at 5001.18,7749.2 h70
  text "B" at 16301.18,7749.2 h70
  text "C" at 5001.18,5839.2 h70
  text "C" at 16301.18,5839.2 h70
  text "Project:" at 11776.18,4382.2 h45
  text "TITLE:" at 13276.18,4382.2 h45
  text "JUNO" at 11866.18,4247.2 h45
  text "PCB DESIGNER:" at 11776.18,4087.2 h45
  text "Suricare RFID" at 13719.49,4060.04 h405
  text "Emilio J. Martinez Perez" at 11866.18,3962.2 h45
  text "D" at 5001.18,3949.2 h70
  text "D" at 16301.18,3949.2 h70
  text "DATE:" at 11776.18,3782.2 h45
  text "PART NO.:" at 13276.18,3782.2 h45
  text "REV:" at 15376.18,3782.2 h45
  text "1 of 1" at 13449.41,3681.57 h45
  text ".PRINT_DATE" at 11826.18,3662.2 h70
  text "2" at 15531.18,3662.2 h45
  text "Root Finisterre Team" at 10575,3550 h70
  text "FILE NAME:" at 11776.18,3482.2 h45
  text "DWG NO:" at 13276.18,3482.2 h45
  text "SCALE:" at 15376.18,3482.2 h45
  text "Granada" at 11200,3425 h70
  text ".PCB_FILE_NAME_NO_PATH" at 11826.18,3362.2 h70
  text "1:1" at 15516.18,3357.2 h45
  text "1 of 1" at 13451.18,3342.2 h45
  text "1" at 6353.18,3147.2 h70
  text "2" at 9213.18,3147.2 h70
  text "3" at 12093.18,3147.2 h70
  text "4" at 14963.18,3147.2 h70

## Panel: embedded boards
"" at 9300,7000, 1 rows x 1 columns, spacing 2500 x 1500, rotation 0

## Text inside footprints (layer, text, board x,y; h text height)
P1: Top Overlay "32" at 11400.59,6600.39 h50; Top Overlay "31" at 11420.28,6492.13 h50; Top Overlay "1" at 13123.03,6492.13 h50; Top Overlay "2" at 13123.03,6600.39 h50